# Altium PCB eDP_adapter_dvt1.PcbDoc (part 1 of 2)
Units mil, origin at the board's own origin, x right, y up, seen from the top; angles counter-clockwise.
Board outline 1964.57 x 1377.95 mil, 4 copper layers (Top Layer, Internal Plane 1, Internal Plane 2, Bottom Layer), stack 65.8 mil thick; 112 components, 78 nets, 1150 pads, 214 vias.
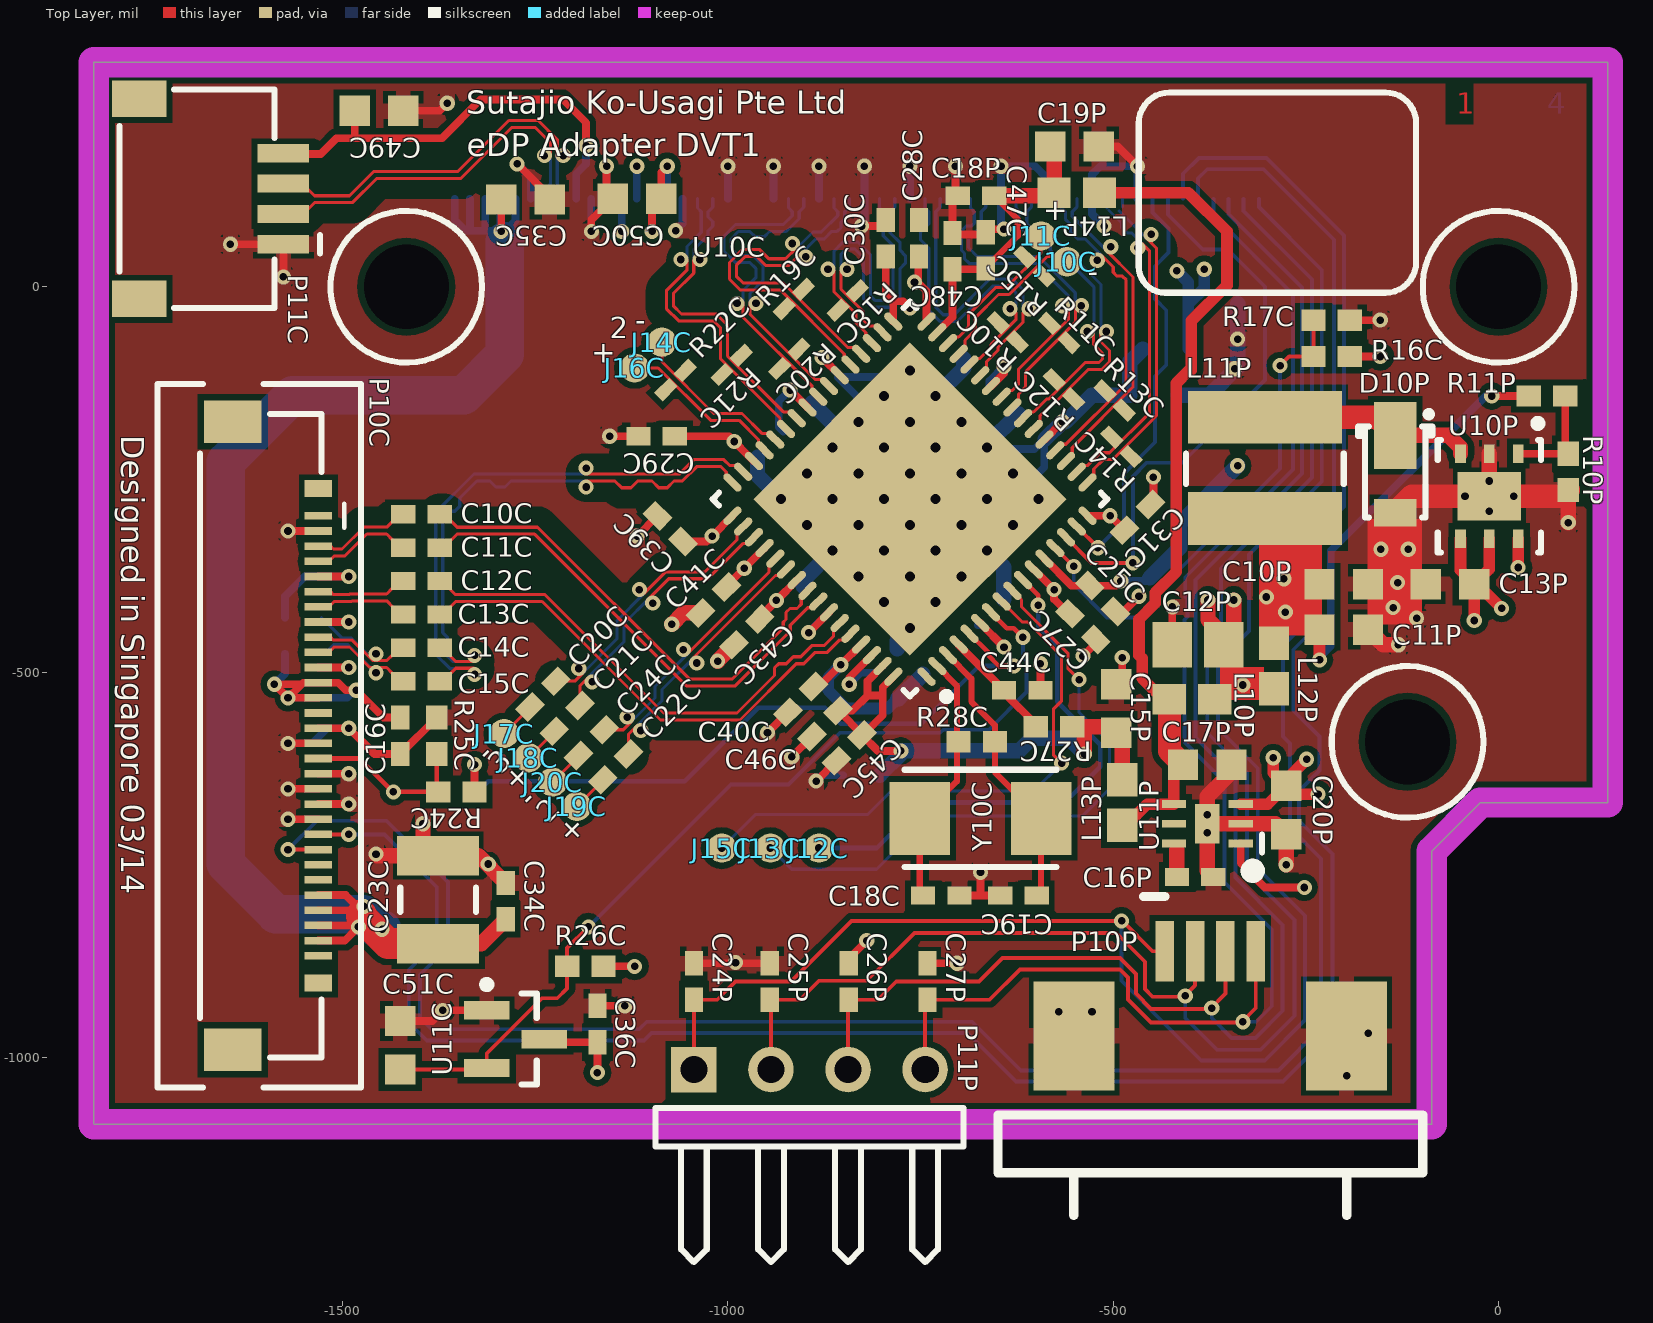
[diagram p0: Top Layer view]
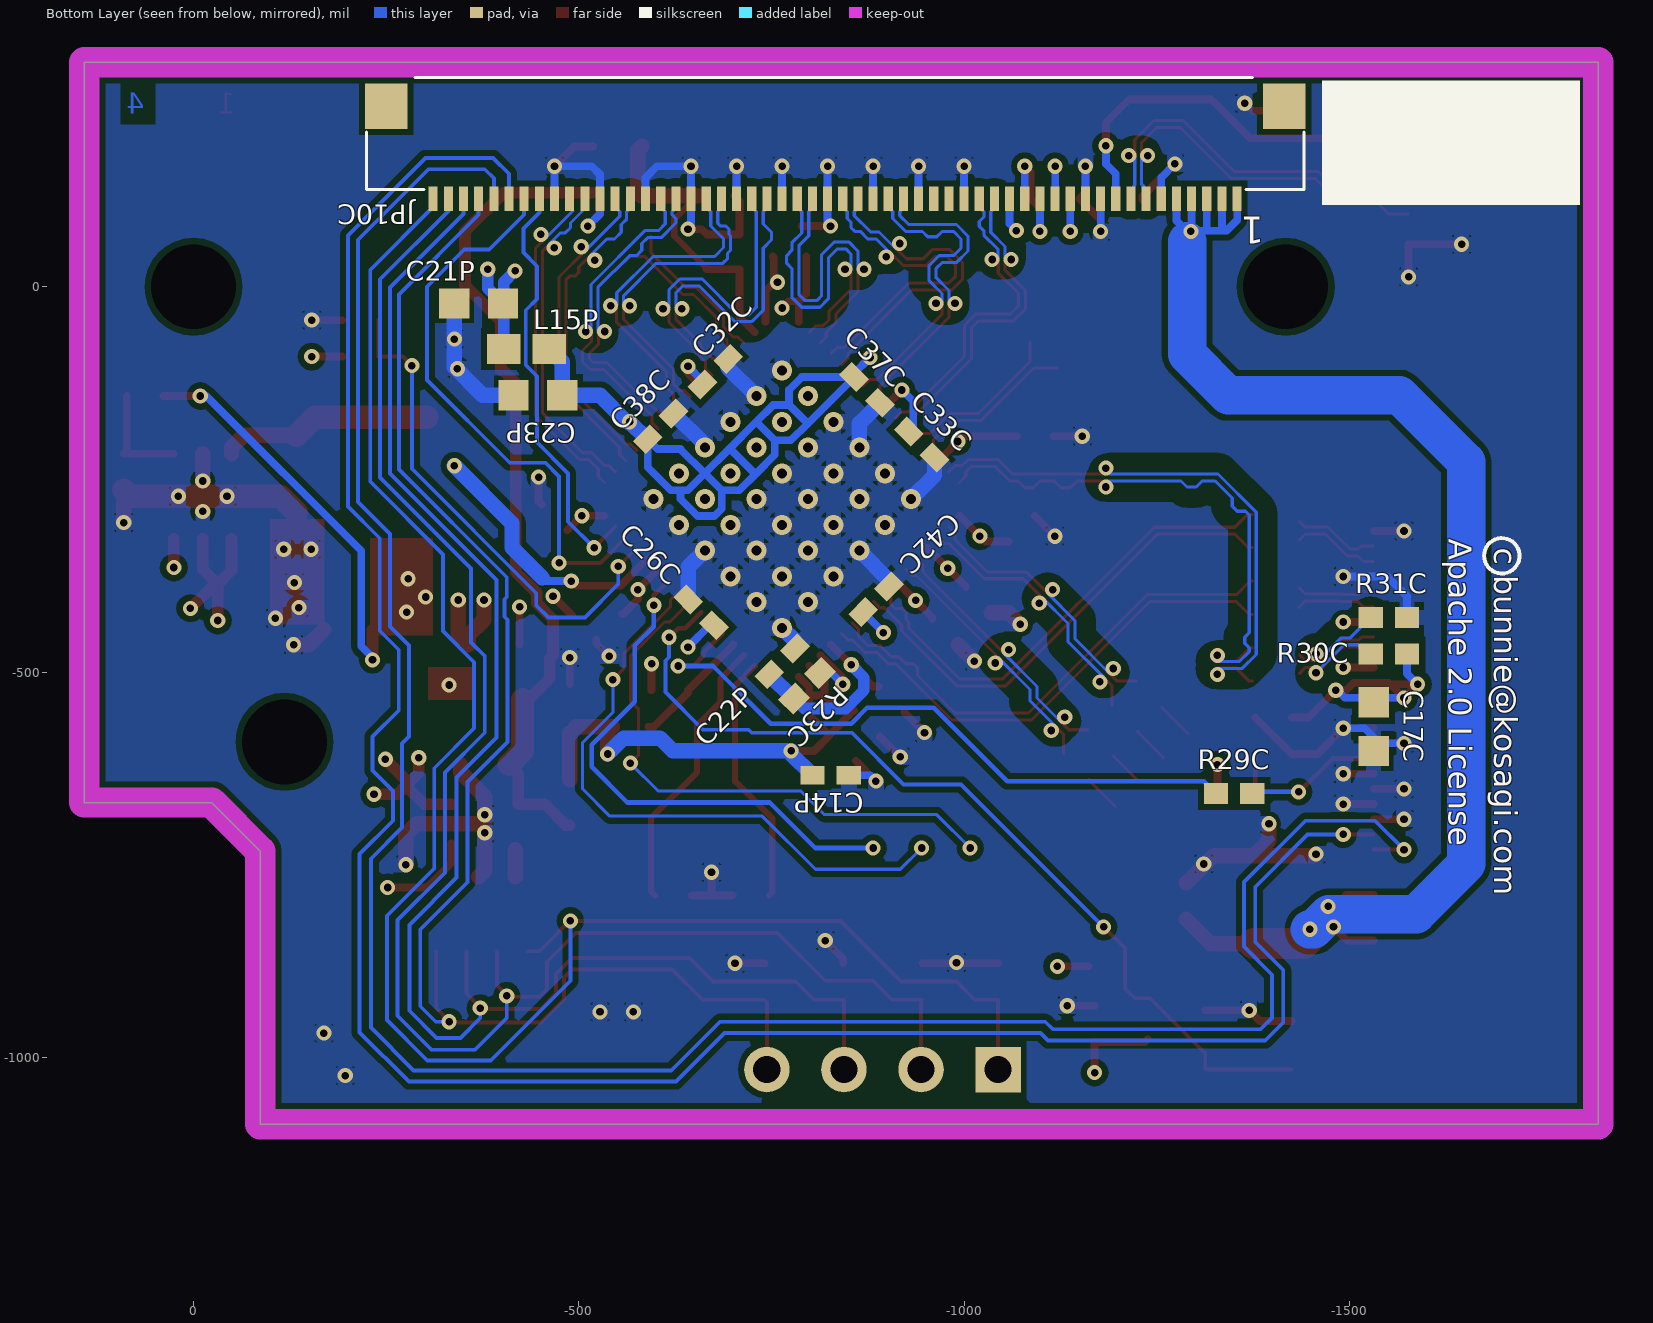
[diagram p1: Bottom Layer view, seen from below]
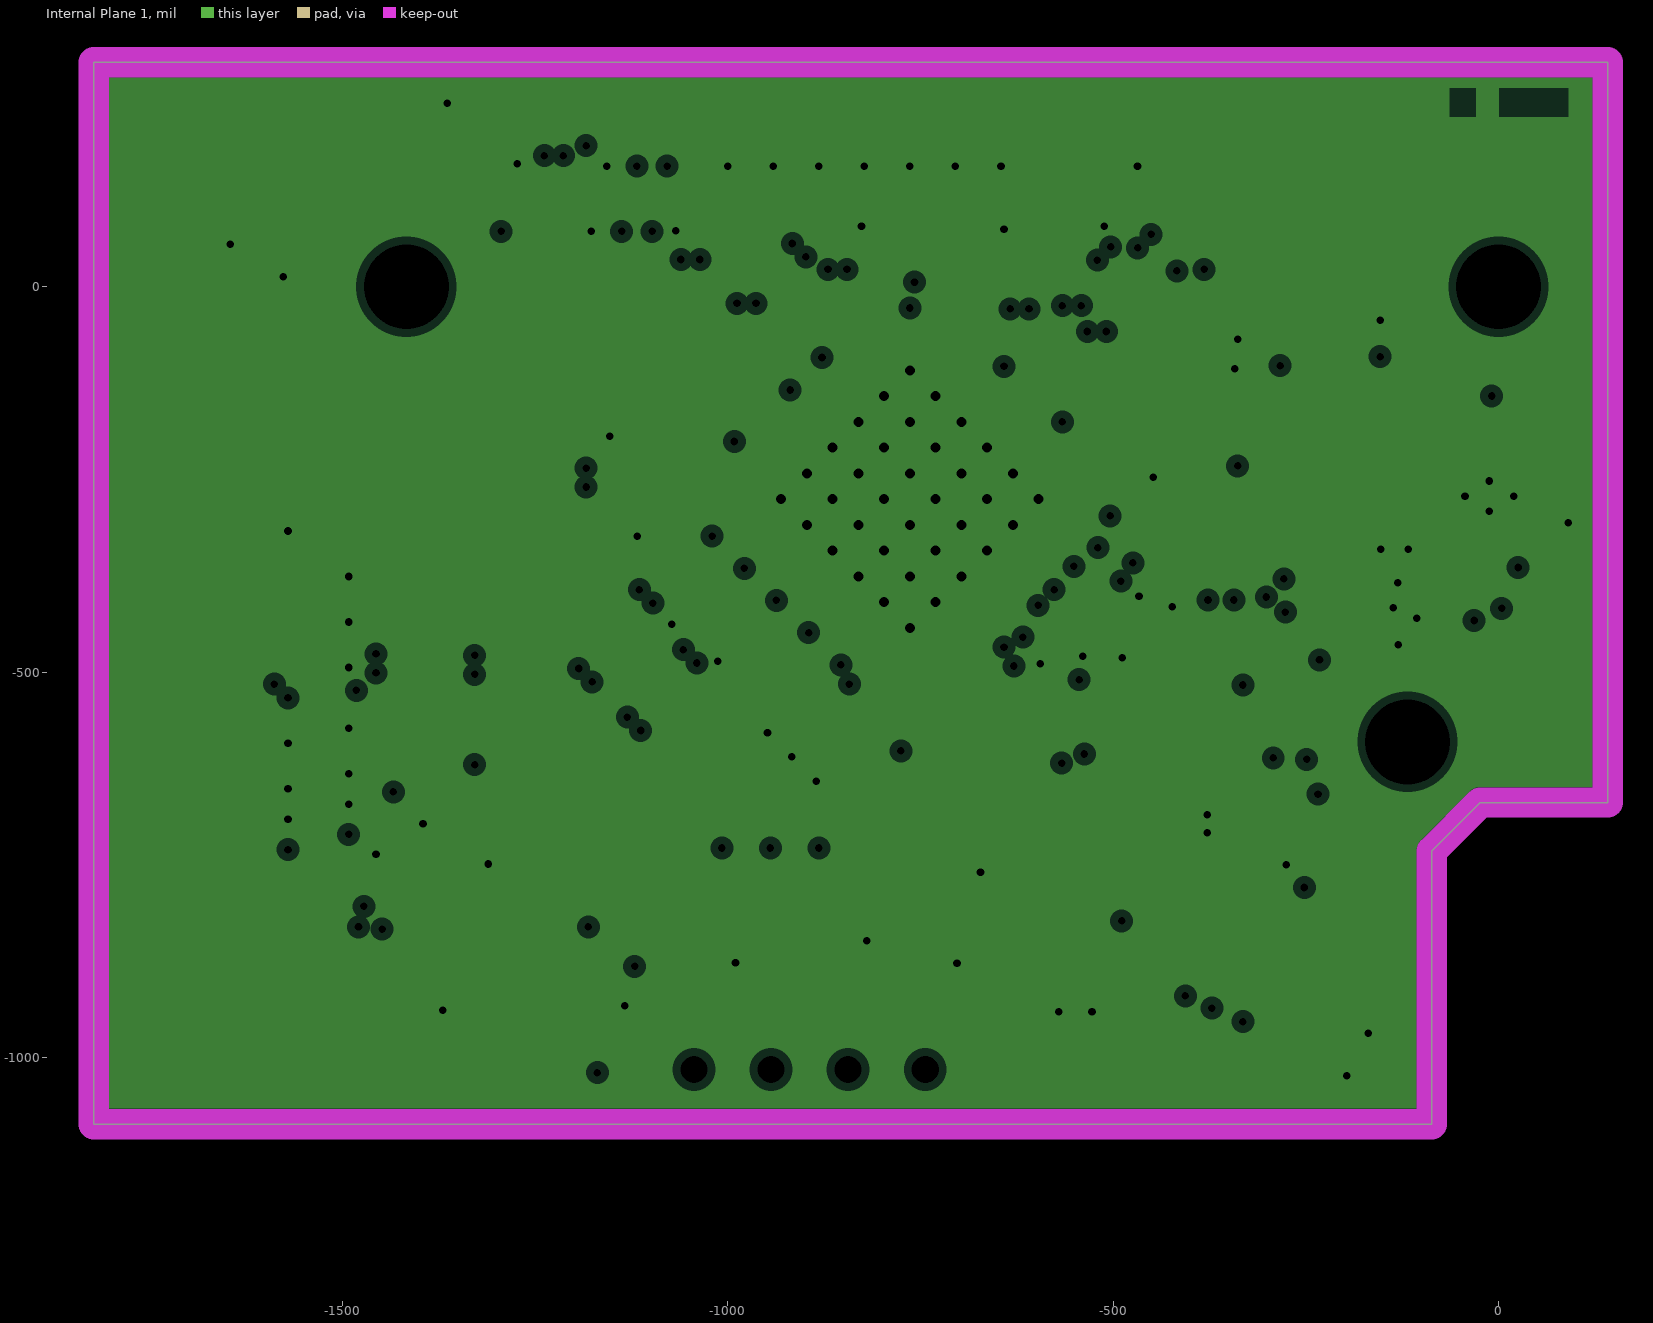
[diagram p2: Internal Plane 1, clearances drawn from the general rule]
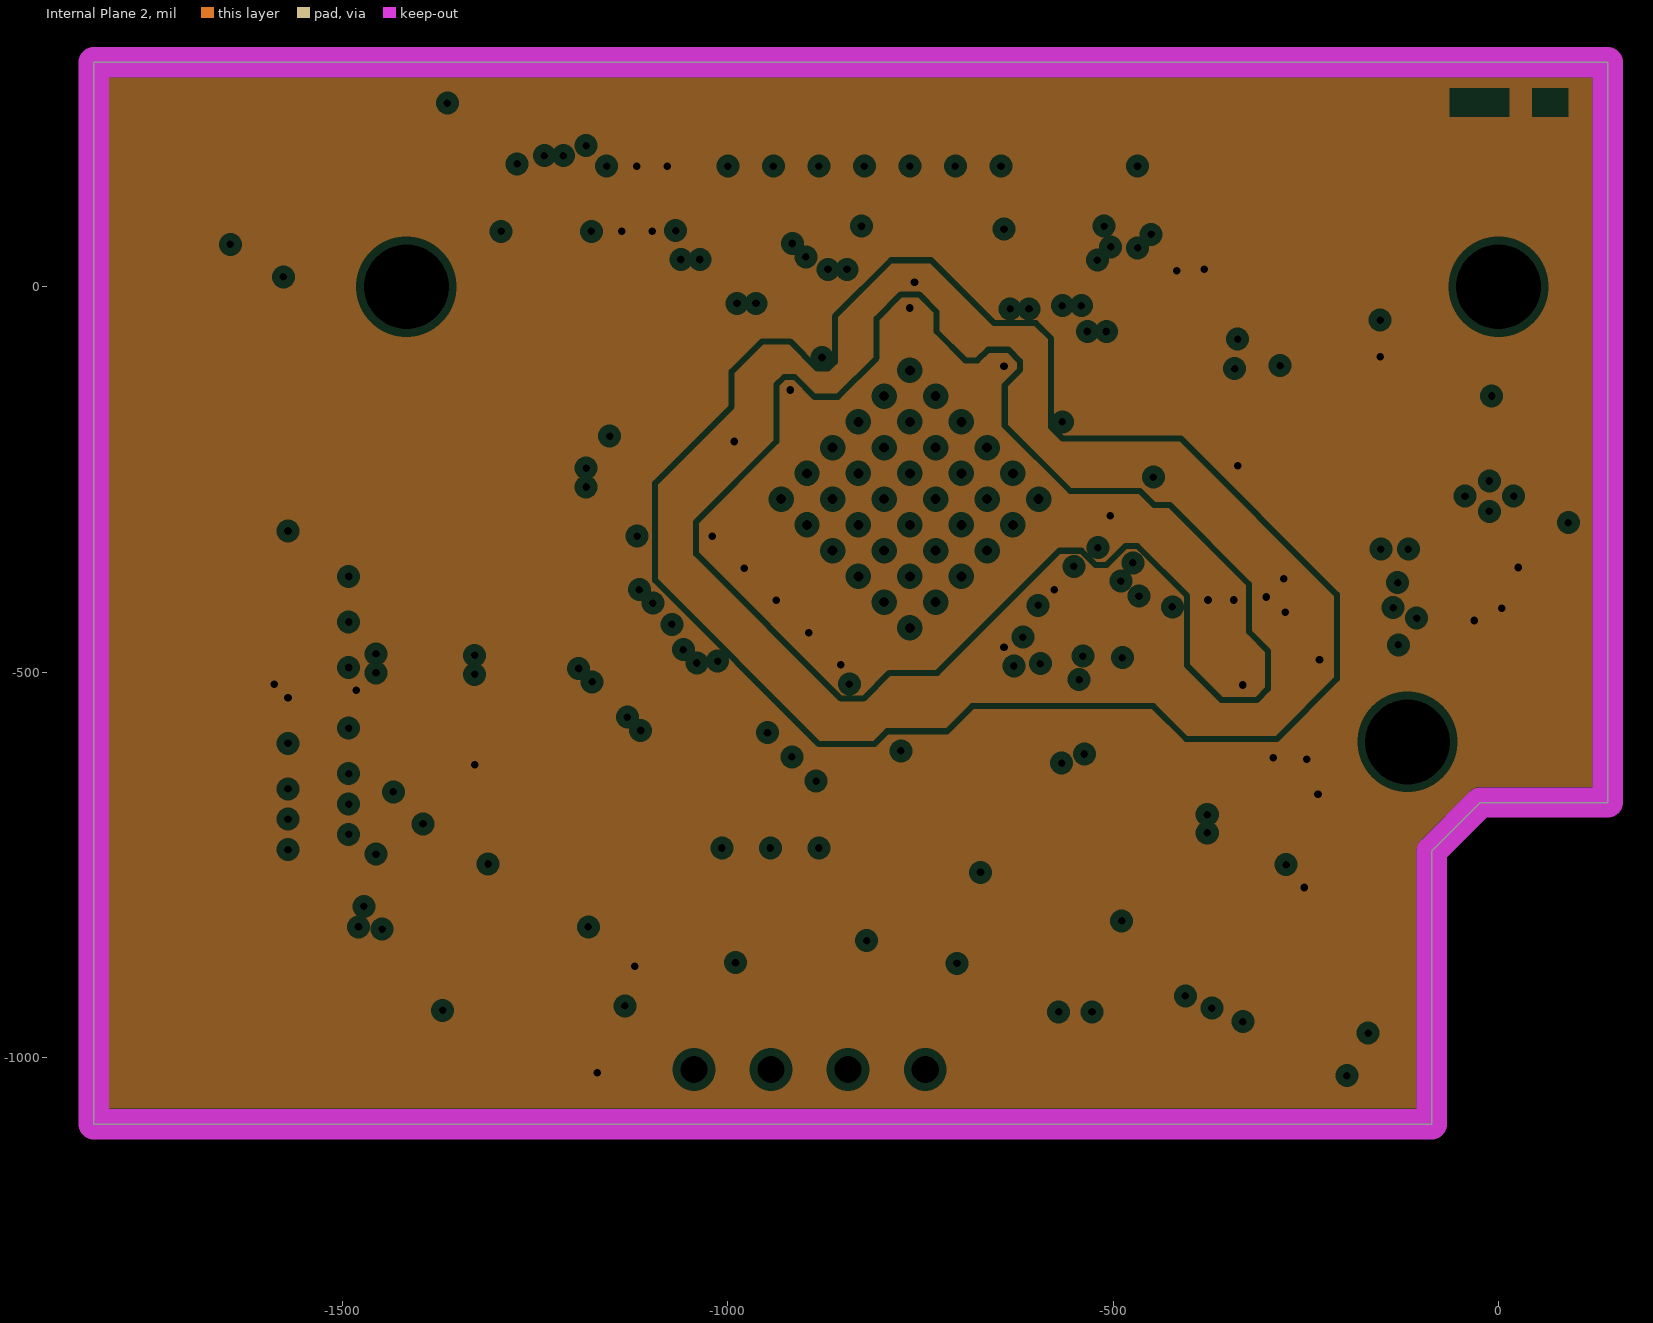
[diagram p3: Internal Plane 2, clearances drawn from the general rule]

## Layer stack, top to bottom
Top Solder: solder mask 0.4, Solder Resist, Dk 3.5
Top Layer: signal copper 1.4
Dielectric1: core 12.6, FR-4, Dk 4.8
Internal Plane 1: plane copper 1.4, net GND
Dielectric2: prepreg 35, FR-4, Dk 4.8
Internal Plane 2: plane copper 1.4, net (Multiple Nets)
Dielectric3: core 12.6, FR-4, Dk 4.8
Bottom Layer: signal copper 1.4
Bottom Solder: solder mask 0.4, Solder Resist, Dk 3.5

## Board outline
-1822.83,-1086.61 -86.61,-1086.61 -86.61,-732.28 -23.62,-669.29 141.73,-669.29 141.73,291.34 -1822.83,291.34

## Design rules (kind name [scope] priority, off if disabled: settings)
Clearance Clearance_diff_to_plane [InPoly vs IsTrack and InDifferentialPairClass('All Differential Pairs')] p1: gap=25
Clearance Clearance_poly [InPoly] p2: gap=8
Clearance Clearance_NPTH [PadIsPlated = 'False'] p3: gap=12
Clearance [All] p4: gap=4
ComponentClearance [All] p1 off: gap=10 collisioncheckmode=3 verticalgap=10 showdistances=FALSE
DiffPairsRouting [All] p1: maxlimit=10 minlimit=5 mostfreqgap=5 toplayer_minwidth=4.02 toplayer_maxwidth=4.02 toplayer_prefwidth=4.02 bottomlayer_minwidth=4.02 bottomlayer_maxwidth=4.02 bottomlayer_prefwidth=4.02 maxuncoupledlength=500
Height [All] p1 off: minheight=0 maxheight=1000 prefheight=500
HoleSize [All] p1: absolutevalues=TRUE maxlimit=175 minlimit=1 maxpercent=80.000 minpercent=20.000
MinimumSolderMaskSliver [All] p1 off: minsoldermaskwidth=10
NetAntennae [All] p1 off: netantennaetolerance=0
PlaneClearance [All] p1: clearance=10
PlaneConnect [All] p1: planeconnectstyle=Direct reliefexpansion=20 reliefentries=4 reliefconductorwidth=10 reliefairgap=10
PolygonConnect [All] p1: connectstyle=Relief reliefconductorwidth=20 reliefentries=4 polygonreliefangle="90 Angle" airgapwidth=6
RoomDefinition it6251_core [InComponentClass('it6251_core')] p1 off: confinementstyle=ConfineIn formatcopy=TRUE lockcomponents=FALSE outline 186.01,-958.67 397.64,-958.67 397.64,383.85 186.01,383.85
RoomDefinition power [InComponentClass('power')] p2 off: confinementstyle=ConfineIn formatcopy=TRUE lockcomponents=FALSE outline 12.78,1131.89 103.35,1131.89 103.35,998.03 12.78,998.03
RoutingVias [All] p1: holewidth=10 width=20 viastyle="Through Hole" minholewidth=8 minwidth=18 maxholewidth=15 maxwidth=30
SilkToSilkClearance [All] p1 off: silktosilkclearance=10
SilkToSolderMaskClearance SilkscreenOverComponentPads [IsPad] p1 off: minsilkscreentomaskgap=10 clearancetoexposedcopper=TRUE
SolderMaskExpansion [All] p1: expansion=2.76
Width [All] p1: maxlimit=200 minlimit=4 preferedwidth=8 minimp=50.000000 maximp=50.000000 favimp=50.000000
19 further rules are at their usual default settings.

## Classes and differential pairs
component class it6251_core: C10C C11C C12C C13C C14C C15C C16C C17C C18C C19C C20C C21C C22C C22P C23C C24C C25C C26C C27C C28C C29C C30C C31C C32C C33C C34C C35C C36C C37C C38C C39C C40C C41C C42C C43C C44C C45C C46C C47C C48C C49C C50C C51C J10C J11C J12C J13C J14C J15C J16C J17C J18C J19C J20C JP10C P10C P11C R10C R11C R12C R13C R14C R15C R16C R17C R18C R19C R20C R21C R22C R23C R24C R25C R26C R27C R28C R29C R30C R31C U10C U11C Y10C
component class power: C10P C11P C12P C13P C14P C15P C16P C17P C18P C19P C20P C21P C23P C24P C25P C26P C27P D10P L10P L11P L12P L13P L14P L15P P10P P11P R10P R11P U10P U11P
differential pair LVDS0_CLK: +LVDS0_CLK_P -LVDS0_CLK_N
differential pair LVDS0_TX_0: +LVDS0_TX_0_P -LVDS0_TX_0_N
differential pair LVDS0_TX_1: +LVDS0_TX_1_P -LVDS0_TX_1_N
differential pair LVDS0_TX_2: +LVDS0_TX_2_P -LVDS0_TX_2_N
differential pair LVDS0_TX_3: +LVDS0_TX_3_P -LVDS0_TX_3_N
differential pair LVDS1_CLK: +LVDS1_CLK_P -LVDS1_CLK_N
differential pair LVDS1_TX0: +LVDS1_TX0_P -LVDS1_TX0_N
differential pair LVDS1_TX1: +LVDS1_TX1_P -LVDS1_TX1_N
differential pair LVDS1_TX2: +LVDS1_TX2_P -LVDS1_TX2_N
differential pair LVDS1_TX_3: +LVDS1_TX_3_P -LVDS1_TX_3_N
differential pair USB_VID: +USB_VID_P -USB_VID_N
differential pair C_EDP_TX0: +C_EDP_TX0_P -C_EDP_TX0_N
differential pair C_EDP_TX1: +C_EDP_TX1_P -C_EDP_TX1_N
differential pair C_EDP_TXAUX: +C_EDP_TXAUX_P -C_EDP_TXAUX_N
differential pair EDP_TX0: +EDP_TX0_P -EDP_TX0_N
differential pair EDP_TX1: +EDP_TX1_P -EDP_TX1_N
differential pair EDP_TXAUX: +EDP_TXAUX_P -EDP_TXAUX_N
differential pair TX2: +TX2_P -TX2_N
differential pair TX3: +TX3_P -TX3_N

## Components (designator, comment, footprint, x,y, rotation, side; value= is the part's Value field where it differs from the comment)
C10C "0.1uF, 25V, X5R" CAPC1005N -1397.64,-295.28 r0 top
C10P "10uF, 10V, X5R, 20%" CAPC1608N -200.79,-385.83 r180 top
C11C "0.1uF, 25V, X5R" CAPC1005N -1397.64,-338.58 r0 top
C11P "10uF, 10V, X5R, 20%" CAPC1608N -200.79,-444.88 r180 top
C12C "0.1uF, 25V, X5R" CAPC1005N -1397.64,-381.89 r0 top
C12P "22uF, 10V, X5R, 20%" CAPC2012N -389.76,-464.57 r180 top
C13C "0.1uF, 25V, X5R" CAPC1005N -1397.64,-425.2 r0 top
C13P "4.7uF, 10V, X5R, 10%" CAPC1608N -62.99,-385.83 r180 top
C14C "0.1uF, 25V, X5R" CAPC1005N -1397.64,-468.5 r0 top
C14P "0.1uF, 25V, X5R" CAPC1005N -826.77,-633.86 r0 bottom
C15C "0.1uF, 25V, X5R" CAPC1005N -1397.64,-511.81 r0 top
C15P "10uF, 10V, X5R, 20%" CAPC1608N -496.06,-547.24 r270 top
C16C "0.1uF, 25V, X5R" CAPC1005N -1425.2,-582.68 r270 top
C16P "0.1uF, 25V, X5R" CAPC1005N -393.7,-765.75 r180 top
C17C "10uF, 10V, X5R, 20%" CAPC1608N -1531.5,-570.87 r90 bottom
C17P "10uF, 10V, X5R, 20%" CAPC1608N -377.95,-620.08 r180 top
C18C "22pF, NP0" CAPC1005N -723.14,-790.07 r180 top
C18P "0.1uF, 25V, X5R" CAPC1005N -678.15,118.11 r0 top
C19C "22pF, NP0" CAPC1005N -622.92,-790.07 r0 top
C19P "10uF, 10V, X5R, 20%" CAPC1608N -550.2,182.09 r180 top
C20C "0.1uF, 25V, X5R" CAPC1005N -1240.16,-528.54 r225 top
C20P "10uF, 10V, X5R, 20%" CAPC1608N -275.59,-679.13 r90 top
C21C "0.1uF, 25V, X5R" CAPC1005N -1208.66,-560.04 r225 top
C21P "10uF, 10V, X5R, 20%" CAPC1608N -370.08,-21.65 r180 bottom
C22C "0.1uF, 25V, X5R" CAPC1005N -1145.67,-623.03 r45 top
C22P "0.1uF, 25V, X5R" CAPC1005N -763.78,-486.22 r315 bottom
C23C "22uF, 25V, X5R, 10%" CAPC3225N -1375.98,-795.28 r90 top
C23P "10uF, 10V, X5R, 20%" CAPC1608N -446.85,-140.75 r180 bottom
C24C "0.1uF, 25V, X5R" CAPC1005N -1177.17,-591.54 r45 top
C24P "10nF, 25V, X5R" CAPC1005N -1044.09,-901.57 r270 top
C25C "0.1uF, 25V, X5R" CAPC1005N -513.78,-404.53 r315 top
C25P "10nF, 25V, X5R" CAPC1005N -945.67,-901.57 r270 top
C26C "0.1uF, 25V, X5R" CAPC1005N -658.69,-422.44 r45 bottom
C26P "10nF, 25V, X5R" CAPC1005N -843.31,-901.57 r270 top
C27C "0.1uF, 25V, X5R" CAPC1005N -539.37,-440.94 r315 top
C27P "10nF, 25V, X5R" CAPC1005N -740.94,-901.57 r270 top
C28C "0.1uF, 25V, X5R" CAPC1005N -751.97,62.99 r90 top
C29C "0.1uF, 25V, X5R" CAPC1005N -1092.52,-193.9 r180 top
C30C "0.1uF, 25V, X5R" CAPC1005N -795.28,62.99 r90 top
C31C "0.1uF, 25V, X5R" CAPC1005N -468.5,-299.21 r45 top
C32C "0.1uF, 25V, X5R" CAPC1005N -677.17,-110.24 r135 bottom
C33C "0.1uF, 25V, X5R" CAPC1005N -944.88,-204.72 r225 bottom
C34C "0.1uF, 25V, X5R" CAPC1005N -1288.39,-797.24 r90 top
C35C "1.0uF, 25V, 20% X5R" CAPC1608N -1262.8,113.19 r0 top
C36C "0.1uF, 25V, X5R" CAPC1005N -1169.29,-956.69 r90 top
C37C "0.1uF, 25V, X5R" CAPC1005N -874.02,-133.86 r225 bottom
C38C "0.1uF, 25V, X5R" CAPC1005N -606.3,-181.1 r135 bottom
C39C "0.1uF, 25V, X5R" CAPC1005N -1074.8,-313.98 r135 top
C40C "0.1uF, 25V, X5R" CAPC1005N -905.51,-535.43 r225 top
C41C "0.1uF, 25V, X5R" CAPC1005N -1018.7,-406.5 r225 top
C42C "0.1uF, 25V, X5R" CAPC1005N -885.83,-405.51 r135 bottom
C43C "0.1uF, 25V, X5R" CAPC1005N -975.39,-447.83 r225 top
C44C "0.1uF, 25V, X5R" CAPC1005N -618.11,-523.62 r0 top
C45C "0.1uF, 25V, X5R" CAPC1005N -842.52,-598.43 r225 top
C46C "1nF, 25V, X5R" CAPC1005N -874.02,-566.93 r225 top
C47C "0.1uF, 25V, X5R" CAPC1005N -665.35,47.24 r90 top
C48C "1nF, 25V, X5R" CAPC1005N -708.66,46.26 r90 top
C49C "10uF, 10V, X5R, 20%" CAPC1608N -1452.76,228.35 r180 top
C50C "10uF, 10V, X5R, 20%" CAPC1608N -1118.11,114.17 r0 top
C51C "DNP" CAPC1608N -1425.2,-984.25 r90 top
D10P "DFLS160-7" POWERDI-123 -133.86,-240.16 r270 top
J10C "test point (DNP)" TP_SMT_38mil -560.04,32.48 r90 top
J11C "test point (DNP)" TP_SMT_38mil -593.5,65.94 r90 top
J12C "test point (DNP)" TP_SMT_38mil -881.89,-728.35 r90 top
J13C "test point (DNP)" TP_SMT_38mil -944.88,-728.35 r135 top
J14C "test point (DNP)" TP_SMT_38mil -1085.63,-71.85 r135 top
J15C "test point (DNP)" TP_SMT_38mil -1007.87,-728.35 r135 top
J16C "test point (DNP)" TP_SMT_38mil -1121.06,-105.32 r135 top
J17C "test point (DNP)" TP_SMT_38mil -1290.35,-579.72 r90 top
J18C "test point (DNP)" TP_SMT_38mil -1258.86,-611.22 r90 top
J19C "test point (DNP)" TP_SMT_38mil -1195.87,-674.21 r90 top
J20C "test point (DNP)" TP_SMT_38mil -1227.36,-642.72 r90 top
JP10C "54-pin FFC MOLEX 51296-5494 or equiv" MOLEX_51296_5494 -1354.33,114.17 r0 bottom
L10P "BLM18KG121 (DNP)" INDC1608AN -397.64,-535.43 r180 top
L11P "2.2uH, coilcraft MSS5131-222ML" COILCRAFT_MSS5121 -303.15,-169.29 r0 top
L12P "BLM18KG121" INDC1608AN -291.34,-492.13 r270 top
L13P "BLM18KG121" INDC1608AN -488.19,-669.29 r90 top
L14P "BLM18KG121" INDC1608AN -547.24,122.05 r180 top
L15P "BLM18KG121" INDC1608AN -432.09,-80.71 r180 bottom
P10C "IPEX 20455-030E-*2 or Tyco (5-)2069716-2 or equiv" TYCO_5-2069716-2 -1531.5,-582.68 r270 top
P10P "AMP 487951-4" AMP_487951_4 -433.07,-862.2 r0 top
P11C "JST 04FMN-SMT-A-TF 1mm side-entry" JST_04FMN_SMT_A_TF -1576.77,55.12 r90 top
P11P "Male 2.54mm 4x1 right-angle header (DNP)" HDR1X4H -1044.09,-1015.75 r0 top
R10C "100, 1% (DNP)" RESC0603N -636.81,-59.06 r315 top
R10P "10k, 1%" RESC1005N 90.55,-240.16 r270 top
R11C "100, 1% (DNP)" RESC0603N -569.88,-60.04 r315 top
R11P "20k, 1%" RESC1005N 62.99,-141.73 r0 top
R12C "100, 1% (DNP)" RESC0603N -563.98,-132.87 r315 top
R13C "100, 1% (DNP)" RESC0603N -498.03,-147.64 r315 top
R14C "100, 1% (DNP)" RESC0603N -489.17,-207.68 r315 top
R15C "100, 1% (DNP)" RESC0603N -602.36,26.57 r315 top
R16C "10k, 1% (DNP)" RESC1005N -216.54,-90.55 r180 top
R17C "10k, 1%" RESC1005N -216.54,-43.31 r0 top
R18C "100, 1% (DNP)" RESC0603N -844.49,-17.72 r225 top
R19C "100, 1% (DNP)" RESC0603N -914.37,-15.75 r225 top
R20C "100, 1% (DNP)" RESC0603N -920.28,-93.5 r225 top
R21C "100, 1% (DNP)" RESC0603N -995.08,-101.38 r225 top
R22C "100, 1% (DNP)" RESC0603N -1067.91,-121.06 r45 top
R23C "820, 1%" RESC1005N -796.26,-517.72 r315 bottom
R24C "100k, 1% (DNP)" RESC1005N -1352.36,-655.51 r180 top
R25C "100k, 1%" RESC1005N -1377.95,-582.68 r90 top
R26C "10k, 1%" RESC1005N -1185.04,-881.89 r180 top
R27C "0 ohm" RESC1005N -576.77,-570.87 r180 top
R28C "1M, 5%" RESC1005N -677.17,-590.55 r180 top
R29C "33, 1%" RESC1005N -1350.39,-657.48 r180 bottom
R30C "100k, 1%" RESC1005N -1551.18,-476.38 r180 bottom
R31C "100k, 1%" RESC1005N -1551.18,-429.13 r180 bottom
U10C "IT6251" QFN50P900X900-64WAN -763.78,-275.59 r135 top
U10P "LMR10510YSD" SON95P300X300X80-7V -11.97,-271.78 r270 top
U11C "APX803-29-SAG-7 2.93V setpoint" SOT23-3N -1275.59,-976.38 r0 top
U11P "MIC5319-1.8YML" MICREL_MLF2x2_6 -342.52,-722.44 r180 top
Y10C "27 MHz, 50ppm, 8-18pF, ESR <80 ohm" NDK_NX5032A -750.98,-689.85 r0 top

## Footprints (in the part's own frame and the unit in brackets; to place one, negate y for a bottom-side part, rotate by r counter-clockwise, add the part's x,y. Pads: shape width x height; smd on the part's side, far side on the other; paste and mask are expansions set on the pad)
AMP_487951_4 [mm] "4-pin FF connector, 1mm pitch"
  rect 0.61x2 smd: 1(0,0) 2(1,0) 3(2,0) 4(3,0)
  rect 2.68x3.6 smd: MP1(-2.99,-2.8) MP2(5.99,-2.8)
  silkscreen extent -5.5,-8.7 8.5,1.8, body extent -4.46,-5.85 7.46,0.7, height 2.7
CAPC1005N [mm] "Chip Capacitor, Body 1.0x0.5mm, IPC Medium Density"
  rect 0.8x0.6 smd: 1(-0.6,0) 2(0.6,0)
  body extent -0.55,-0.3 0.55,0.3, height 0.6
CAPC1608N [mm] "Chip Capacitor, Body 1.6x0.8mm, IPC Medium Density"
  rect 1x1 smd: 1(-0.8,0) 2(0.8,0)
  body extent -0.87,-0.48 0.87,0.48, height 0.85
CAPC2012N [mm] "Chip Capacitor, Body 2.0x1.3mm, IPC Medium Density"
  rect 1.3x1.5 smd: 1(-0.85,0) 2(0.85,0)
  body extent -1.1,-0.72 1.1,0.72, height 1.1
CAPC3225N [mm] "Chip Capacitor, Body 3.2x2.5mm, IPC Medium Density"
  rect 1.3x2.7 smd: 1(-1.45,0) 2(1.45,0)
  silkscreen extent -0.4,-1.25 0.4,1.25, body extent -1.7,-1.35 1.7,1.35, height 1.35
COILCRAFT_MSS5121 [mm] "Coilcraft shielded power inductor"
  rect 5.08x1.74 smd mask+0.075: 1(0,0) 2(0,-3.34)
  silkscreen extent -2.6,-2.2 2.6,-1.2, body extent -2.6,-4.3 2.6,0.9, height 2.2
HDR1X4H [mm] "Connector; Header; 4 Position; Right Angle"
  rect 1.5x1.5 hole 0.9: 1(0,0)
  round 1.5 hole 0.9: 2(2.54,0) 3(5.08,0) 4(7.62,0)
  silkscreen extent -1.27,-6.35 8.89,-1.27
INDC1608AN [mm] "Chip Inductor, Body 1.6x0.8mm, IPC Medium Density"
  rect 1.1x1 smd: 1(-0.75,0) 2(0.75,0)
  body extent -0.9,-0.5 0.9,0.5, height 1
JST_04FMN_SMT_A_TF [mm] "JST 4-pin side-entry 1mm SMT FFC/FPC connector"
  rect 1.2x1.8 smd mask+0.07: 0(-1.8,4.75) 0(4.8,4.75)
  rect 0.6x1.7 smd mask+0.07: 1(0,0) 2(1,0) 3(2,0) 4(3,0)
  silkscreen extent -2.1,-1.2 5.1,5.4, body extent -2.1,0.3 5.1,5.4, height 3.05
MICREL_MLF2x2_6 [mm] "6-pin 2x2mm MLF package (Micrel)"
  rect 0.8x0.26 smd mask+0.07: 1(-0.2,0) 2(-0.2,-0.65) 3(-0.2,-1.3) 4(2,-1.3) 5(2,-0.65) 6(2,0)
  rect 0.8x1.3 smd mask+0.07: PAD(0.9,-0.65)
  silkscreen extent -0.9,-0.3 -0.4,1.1, body extent -0.1,-1.7 1.9,0.3, height 0.85
MOLEX_51296_5494 [mm] "54-pin FF connector"
  rect 1.4x1.5 smd mask+0.07: 0(-1.55,-3.05) 0(28.05,-3.05)
  rect 0.3x0.8 smd mask+0.07: 1(0,0) 2(0.5,0) 3(1,0) 4(1.5,0) 5(2,0) 6(2.5,0) 7(3,0) 8(3.5,0) 9(4,0) 10(4.5,0) 11(5,0) 12(5.5,0) 13(6,0) 14(6.5,0) 15(7,0) 16(7.5,0) 17(8,0) 18(8.5,0) 19(9,0) 20(9.5,0) 21(10,0) 22(10.5,0) 23(11,0) 24(11.5,0) 25(12,0) 26(12.5,0) 27(13,0) 28(13.5,0) 29(14,0) 30(14.5,0) 31(15,0) 32(15.5,0) 33(16,0) 34(16.5,0) 35(17,0) 36(17.5,0) 37(18,0) 38(18.5,0) 39(19,0) 40(19.5,0) 41(20,0) 42(20.5,0) 43(21,0) 44(21.5,0) 45(22,0) 46(22.5,0) 47(23,0) 48(23.5,0) 49(24,0) 50(24.5,0) 51(25,0) 52(25.5,0) 53(26,0) 54(26.5,0)
  silkscreen extent -2.2,-4 28.7,-0.3, body extent -2.2,-4 28.7,-0.3, height 1.3
NDK_NX5032A [mm] "5x3.2mm crystal, SMT"
  rect 2x2.4 smd: 1(0,0) 2(4,0)
  silkscreen extent -0.5,-1.6 4.5,1.6
POWERDI-123 [mm] "SOD-123 power package, Diodes Inc"
  rect 0.9x1.4 smd: 1(1.35,0)
  rect 2.2x1.4 smd: 2(-1.2,0)
  silkscreen extent -1.95,-1.22 1.5,1.23, body extent -1.5,-0.96 1.5,0.96, height 1
QFN50P900X900-64WAN [mm] "QFN, 64-Leads, Body 9x9mm, Pitch 0.5mm, IPC Medium Density"
  oval 0.75x0.25 smd: 1(-4.525,3.75) 2(-4.525,3.25) 3(-4.525,2.75) 4(-4.525,2.25) 5(-4.525,1.75) 6(-4.525,1.25) 7(-4.525,0.75) 8(-4.525,0.25) 9(-4.525,-0.25) 10(-4.525,-0.75) 11(-4.525,-1.25) 12(-4.525,-1.75) 13(-4.525,-2.25) 14(-4.525,-2.75) 15(-4.525,-3.25) 16(-4.525,-3.75) 33(4.525,-3.75) 34(4.525,-3.25) 35(4.525,-2.75) 36(4.525,-2.25) 37(4.525,-1.75) 38(4.525,-1.25) 39(4.525,-0.75) 40(4.525,-0.25) 41(4.525,0.25) 42(4.525,0.75) 43(4.525,1.25) 44(4.525,1.75) 45(4.525,2.25) 46(4.525,2.75) 47(4.525,3.25) 48(4.525,3.75)
  oval 0.25x0.75 smd: 17(-3.75,-4.525) 18(-3.25,-4.525) 19(-2.75,-4.525) 20(-2.25,-4.525) 21(-1.75,-4.525) 22(-1.25,-4.525) 23(-0.75,-4.525) 24(-0.25,-4.525) 25(0.25,-4.525) 26(0.75,-4.525) 27(1.25,-4.525) 28(1.75,-4.525) 29(2.25,-4.525) 30(2.75,-4.525) 31(3.25,-4.525) 32(3.75,-4.525) 49(3.75,4.525) 50(3.25,4.525) 51(2.75,4.525) 52(2.25,4.525) 53(1.75,4.525) 54(1.25,4.525) 55(0.75,4.525) 56(0.25,4.525) 57(-0.25,4.525) 58(-0.75,4.525) 59(-1.25,4.525) 60(-1.75,4.525) 61(-2.25,4.525) 62(-2.75,4.525) 63(-3.25,4.525) 64(-3.75,4.525)
  rect 7.3x7.3 smd mask-5: 65(0,0)
  silkscreen extent -5.57,-4.6 4.6,4.6, body extent -4.58,-4.58 4.58,4.58, height 0.8
RESC0603N [mm] "Chip Resistor, Body 0.6x0.3mm, IPC Medium Density"
  rect 0.7x0.4 smd: 1(-0.45,0) 2(0.45,0)
  body extent -0.32,-0.17 0.32,0.17, height 0.3
RESC1005N [mm] "Chip Resistor, Body 1.1x0.5mm, IPC Medium Density"
  rect 0.8x0.7 smd: 1(-0.6,0) 2(0.6,0)
  body extent -0.55,-0.3 0.55,0.3, height 0.4
SON95P300X300X80-7V [mm] "SON, 6-Leads, Body 3x3 mm, Pitch 0.95mm, NSC Recommended"
  rect 0.6x0.35 smd paste-0.175 mask+0.051: 1(-1.4,0.95) 2(-1.4,0) 3(-1.4,-0.95) 4(1.4,-0.95) 5(1.4,0) 6(1.4,0.95)
  rect 1.6x2.1 smd paste-0.8 mask+0.051: 7(0,0)
  silkscreen extent -2.52,-1.7 1.85,1.73, body extent -1.55,-1.55 1.55,1.55, height 0.8
SOT23-3N [mm] "SOT23, 3-Leads, Body 2.9x1.3mm, Pitch 0.95mm, Lead Span 2.5mm, IPC Medium Density"
  rect 1.5x0.6 smd: 1(-0.95,0.95) 2(-0.95,-0.95) 3(0.95,0)
  silkscreen extent -1.07,-1.5 0.7,1.92, body extent -0.7,-1.5 0.7,1.5, height 1.1
TP_SMT_38mil [mil] "38 mil round test point, SMT"
  round 38 smd: 1(0,0)
TYCO_5-2069716-2 [mm] "LCEDI 0.5mm connector / CABLINE-VS 30-pin connector"
  rect 1.4x1.9 smd mask+0.07: 0(-10.35,-2.82) 0(10.35,-2.82)
  rect 0.55x0.9 smd mask+0.07: 0(-8.15,0) 0(8.15,0)
  rect 0.25x0.9 smd mask+0.07: 1(-7.25,0) 2(-6.75,0) 3(-6.25,0) 4(-5.75,0) 5(-5.25,0) 6(-4.75,0) 7(-4.25,0) 8(-3.75,0) 9(-3.25,0) 10(-2.75,0) 11(-2.25,0) 12(-1.75,0) 13(-1.25,0) 14(-0.75,0) 15(-0.25,0) 16(0.25,0) 17(0.75,0) 18(1.25,0) 19(1.75,0) 20(2.25,0) 21(2.75,0) 22(3.25,0) 23(3.75,0) 24(4.25,0) 25(4.75,0) 26(5.25,0) 27(5.75,0) 28(6.25,0) 29(6.75,0) 30(7.25,0)
  silkscreen extent -11.6,-5.3 11.6,1.4, body extent -10.62,-3.95 10.63,0, height 0.97

## Part data
C10C C10P C11C C11P C12C C12P C13C C13P C14C C14P C15C C15P C16C C16P C17C C17P C18C C18P C19C C19P C20C C20P C21C C21P C22C C22P C23C C23P C24C C24P C25C C25P C26C C26P C27C C27P C28C C29C C30C C31C C32C C33C C34C C35C C36C C37C C38C C39C C40C C41C C42C C43C C44C C45C C46C C47C C48C C49C C50C C51C: library part "Cap Semi", "Capacitor (Semiconductor SIM Model)"
D10P: library part "D Schottky", "Schottky Diode"
J10C J11C J12C J13C J14C J15C J16C J17C J18C J19C J20C: library part CON1, "Connector"
JP10C: library part HEADER_54, "Flat flex connector, 54 positions"
L10P L11P L12P L13P L14P L15P: library part "Inductor Iron", "Magnetic-Core Inductor"
P10C: library part "Header 30"
P10P: library part TFT_TP_CON
P11C: library part "Header 4", "Header, 4-Pin"
P11P: library part "Header 4H", "Header, 4-Pin, Right Angle"
R10C R10P R11C R11P R12C R13C R14C R15C R16C R17C R18C R19C R20C R21C R22C R23C R24C R25C R26C R27C R28C R29C R30C R31C: library part Res1, "Resistor"
U10C: "LVDS to eDP converter"
U10P: library part LMR10515XSD, "NatSemi 1.5A step-down regulator in LLP"
U11C: library part RESET_SOT23, "Reset monitor. Voltage specified by XX in P/N. Multiple vendors."
U11P: library part MIC5319-XXYML, "500 mA uCap ultra-low dropout high PSRR LDO regulator"
Y10C: library part XTAL, "Crystal Oscillator"

## Free pads (board coordinates)
  round 47.24 hole 110.24 unplated: 0(-118.11,-590.55) 1(0,0) 2(-1417.32,0)
  rect 2x34 on Bottom Overlay: 1(-1778.25,-155.02) 1(-1736.25,-237.02) 1(-1736.25,-73.02) 1(-1542.25,-237.02) 1(-1542.25,-73.02)
  rect 2x38 on Bottom Overlay: 1(-1776.25,-155.02) 1(-1774.25,-155.02) 1(-1772.25,-155.02) 1(-1734.25,-237.02) 1(-1734.25,-73.02)
  rect 2x40 on Bottom Overlay: 1(-1770.25,-156.02) 1(-1544.25,-236.02) 1(-1544.25,-74.02)
  rect 2x42 on Bottom Overlay: 1(-1768.25,-155.02) 1(-1766.25,-155.02) 1(-1764.25,-155.02) 1(-1762.25,-155.02) 1(-1760.25,-155.02)
  rect 2x44 on Bottom Overlay: 1(-1758.25,-156.02) 1(-1732.25,-236.02) 1(-1732.25,-74.02) 1(-1546.25,-236.02) 1(-1546.25,-74.02)
  rect 2x46 on Bottom Overlay: 1(-1756.25,-155.02) 1(-1754.25,-155.02) 1(-1752.25,-155.02) 1(-1750.25,-155.02)
  rect 2x4 on Bottom Overlay: 1(-1748.25,-240.02) 1(-1748.25,-70.02) 1(-1542.25,-198.02) 1(-1542.25,-112.02)
  rect 2x48 on Bottom Overlay: 1(-1748.25,-156.02) 1(-1730.25,-236.02) 1(-1730.25,-74.02)
  rect 2x10 on Bottom Overlay: 1(-1746.25,-239.02) 1(-1746.25,-71.02) 1(-1544.25,-199.02) 1(-1544.25,-111.02) 1(-1532.25,-239.02) 1(-1532.25,-71.02)
  rect 2x50 on Bottom Overlay: 1(-1746.25,-155.02) 1(-1744.25,-155.02) 1(-1742.25,-155.02) 1(-1740.25,-155.02)
  rect 2x14 on Bottom Overlay: 1(-1744.25,-239.02) 1(-1744.25,-71.02) 1(-1546.25,-201.02) 1(-1546.25,-109.02) 1(-1534.25,-239.02)
  rect 2x20 on Bottom Overlay: 1(-1742.25,-72.02) 1(-1536.25,-72.02) 1(-1536.25,-238.02)
  rect 2x18 on Bottom Overlay: 1(-1742.25,-239.02)
  rect 2x24 on Bottom Overlay: 1(-1740.25,-238.02) 1(-1740.25,-72.02) 1(-1538.25,-238.02)
  rect 2x28 on Bottom Overlay: 1(-1738.25,-238.02)
  rect 2x58 on Bottom Overlay: 1(-1738.25,-155.02)
  rect 2x30 on Bottom Overlay: 1(-1738.25,-73.02) 1(-1540.25,-237.02) 1(-1540.25,-73.02)
  rect 2x68 on Bottom Overlay: 1(-1736.25,-156.02) 1(-1586.25,-212.02) 1(-1586.25,-98.02) 1(-1584.25,-98.02) 1(-1584.25,-212.02) 1(-1582.25,-98.02) 1(-1580.25,-214.02) 1(-1580.25,-96.02) 1(-1576.25,-216.02) 1(-1576.25,-94.02) 1(-1548.25,-84.02)
  rect 2x78 on Bottom Overlay: 1(-1734.25,-155.02) 1(-1674.25,-97.02) 1(-1674.25,-213.02) 1(-1604.25,-215.02) 1(-1604.25,-95.02)
  rect 2x86 on Bottom Overlay: 1(-1732.25,-155.02)
  rect 2x98 on Bottom Overlay: 1(-1730.25,-155.02) 1(-1640.25,-245.02) 1(-1638.25,-245.02) 1(-1636.25,-245.02)
  rect 2x214 on Bottom Overlay: 1(-1728.25,-155.02) 1(-1718.25,-155.02)
  rect 2x218 on Bottom Overlay: 1(-1726.25,-155.02) 1(-1722.25,-155.02) 1(-1720.25,-155.02)
  rect 2x222 on Bottom Overlay: 1(-1724.25,-155.02)
  rect 2x210 on Bottom Overlay: 1(-1716.25,-155.02) 1(-1714.25,-155.02)
  rect 2x206 on Bottom Overlay: 1(-1712.25,-155.02)
  rect 2x202 on Bottom Overlay: 1(-1710.25,-155.02)
  rect 2x200 on Bottom Overlay: 1(-1708.25,-156.02)
  rect 2x198 on Bottom Overlay: 1(-1706.25,-155.02)
  rect 2x194 on Bottom Overlay: 1(-1704.25,-155.02)
  rect 2x192 on Bottom Overlay: 1(-1702.25,-156.02)
  rect 2x190 on Bottom Overlay: 1(-1700.25,-155.02) 1(-1682.25,-155.02) 1(-1680.25,-155.02)
  rect 2x186 on Bottom Overlay: 1(-1698.25,-155.02) 1(-1686.25,-155.02) 1(-1684.25,-155.02)
  rect 2x184 on Bottom Overlay: 1(-1696.25,-156.02)
  rect 2x182 on Bottom Overlay: 1(-1694.25,-155.02) 1(-1692.25,-155.02) 1(-1690.25,-155.02) 1(-1688.25,-155.02)
  rect 2x92 on Bottom Overlay: 1(-1678.25,-206.02) 1(-1618.25,-236.02) 1(-1618.25,-74.02)
  rect 2x90 on Bottom Overlay: 1(-1678.25,-105.02) 1(-1660.25,-235.02) 1(-1660.25,-77.02)
  rect 2x84 on Bottom Overlay: 1(-1676.25,-210.02) 1(-1676.25,-100.02) 1(-1616.25,-80.02) 1(-1616.25,-230.02)
  rect 2x76 on Bottom Overlay: 1(-1672.25,-216.02) 1(-1672.25,-94.02) 1(-1608.25,-92.02) 1(-1606.25,-216.02) 1(-1606.25,-94.02) 1(-1596.25,-212.02) 1(-1596.25,-98.02) 1(-1594.25,-212.02) 1(-1594.25,-98.02) 1(-1554.25,-228.02) 1(-1554.25,-82.02)
  rect 2x74 on Bottom Overlay: 1(-1670.25,-217.02) 1(-1670.25,-93.02) 1(-1668.25,-219.02) 1(-1614.25,-223.02) 1(-1614.25,-87.02) 1(-1608.25,-219.02) 1(-1592.25,-213.02) 1(-1592.25,-99.02) 1(-1564.25,-223.02) 1(-1560.25,-225.02) 1(-1560.25,-85.02) 1(-1558.25,-227.02) 1(-1558.25,-85.02) 1(-1556.25,-227.02) 1(-1556.25,-83.02)
  rect 2x72 on Bottom Overlay: 1(-1668.25,-92.02) 1(-1666.25,-90.02) 1(-1666.25,-220.02) 1(-1664.25,-222.02) 1(-1664.25,-88.02) 1(-1612.25,-222.02) 1(-1612.25,-90.02) 1(-1610.25,-220.02) 1(-1610.25,-90.02) 1(-1590.25,-212.02) 1(-1590.25,-98.02) 1(-1588.25,-212.02) 1(-1588.25,-98.02) 1(-1568.25,-90.02) 1(-1566.25,-222.02) 1(-1566.25,-88.02) 1(-1564.25,-88.02) 1(-1562.25,-224.02) 1(-1562.25,-86.02) 1(-1552.25,-228.02) 1(-1552.25,-82.02)
  rect 2x80 on Bottom Overlay: 1(-1662.25,-228.02) 1(-1662.25,-82.02) 1(-1602.25,-214.02) 1(-1602.25,-98.02) 1(-1600.25,-212.02) 1(-1600.25,-98.02) 1(-1598.25,-212.02) 1(-1598.25,-98.02)
  rect 2x100 on Bottom Overlay: 1(-1658.25,-240.02) 1(-1658.25,-70.02) 1(-1650.25,-244.02) 1(-1650.25,-66.02) 1(-1648.25,-244.02) 1(-1648.25,-66.02) 1(-1646.25,-66.02) 1(-1646.25,-244.02) 1(-1644.25,-244.02) 1(-1644.25,-66.02) 1(-1642.25,-244.02) 1(-1642.25,-66.02) 1(-1640.25,-66.02) 1(-1638.25,-66.02) 1(-1636.25,-66.02) 1(-1634.25,-244.02) 1(-1634.25,-66.02) 1(-1632.25,-244.02) 1(-1632.25,-66.02) 1(-1630.25,-244.02) 1(-1630.25,-66.02) 1(-1628.25,-244.02) 1(-1628.25,-66.02) 1(-1626.25,-244.02)
  rect 2x102 on Bottom Overlay: 1(-1656.25,-243.02) 1(-1654.25,-243.02) 1(-1654.25,-67.02) 1(-1652.25,-243.02) 1(-1652.25,-67.02) 1(-1626.25,-67.02) 1(-1624.25,-243.02) 1(-1624.25,-67.02) 1(-1622.25,-243.02) 1(-1622.25,-67.02) 1(-1620.25,-241.02) 1(-1620.25,-69.02)
  rect 2x104 on Bottom Overlay: 1(-1656.25,-68.02)
  rect 2x66 on Bottom Overlay: 1(-1582.25,-213.02) 1(-1548.25,-227.02)
  rect 2x70 on Bottom Overlay: 1(-1578.25,-215.02) 1(-1578.25,-95.02) 1(-1574.25,-217.02) 1(-1574.25,-93.02) 1(-1572.25,-219.02) 1(-1572.25,-91.02) 1(-1570.25,-219.02) 1(-1570.25,-91.02) 1(-1568.25,-221.02) 1(-1550.25,-227.02) 1(-1550.25,-83.02)
  rect 2x26 on Bottom Overlay: 1(-1538.25,-73.02)
  rect 2x16 on Bottom Overlay: 1(-1534.25,-72.02)
  rect 2x6 on Bottom Overlay: 1(-1530.25,-239.02) 1(-1530.25,-71.02)
  rect 8x2 on Top Overlay: 1(-440.83,51.21) 1(-402.83,115.21) 1(-400.83,209.21) 1(-396.83,215.21) 1(-384.83,183.21) 1(-378.83,11.21) 1(-352.83,171.21) 1(-346.83,113.21) 1(-346.83,203.21) 1(-342.83,209.21) 1(-340.83,211.21) 1(-338.83,215.21) 1(-336.83,217.21) 1(-334.83,223.21) 1(-332.83,185.21) 1(-332.83,225.21) 1(-330.83,187.21) 1(-328.83,189.21) 1(-326.83,191.21) 1(-316.83,205.21) 1(-316.83,207.21) 1(-314.83,209.21) 1(-312.83,213.21) 1(-310.83,55.21) 1(-310.83,215.21) 1(-310.83,217.21) 1(-264.83,201.21) 1(-256.83,219.21) 1(-234.83,231.21) 1(-228.83,159.21) 1(-228.83,225.21) 1(-226.83,203.21) 1(-224.83,205.21) 1(-224.83,237.21) 1(-222.83,207.21) 1(-220.83,209.21) 1(-220.83,233.21) 1(-218.83,231.21) 1(-202.83,113.21) 1(-200.83,115.21) 1(-200.83,177.21) 1(-198.83,119.21) 1(-196.83,215.21) 1(-194.83,181.21) 1(-192.83,209.21) 1(-186.83,145.21) 1(-186.83,187.21) 1(-184.83,189.21) 1(-182.83,191.21) 1(-180.83,193.21) 1(-178.83,195.21) 1(-176.83,183.21) 1(-176.83,197.21) 1(-174.83,199.21) 1(-172.83,201.21) 1(-170.83,203.21) 1(-164.83,173.21) 1(-160.83,37.21) 1(-158.83,115.21) 1(-142.83,37.21)
  rect 10x2 on Top Overlay: 1(-439.83,53.21) 1(-437.83,55.21) 1(-435.83,57.21) 1(-435.83,179.21) 1(-433.83,59.21) 1(-433.83,181.21) 1(-431.83,61.21) 1(-429.83,63.21) 1(-429.83,183.21) 1(-427.83,65.21) 1(-425.83,185.21) 1(-423.83,71.21) 1(-423.83,187.21) 1(-421.83,73.21) 1(-419.83,189.21) 1(-417.83,191.21) 1(-415.83,193.21) 1(-413.83,195.21) 1(-411.83,197.21) 1(-405.83,203.21) 1(-403.83,205.21) 1(-401.83,113.21) 1(-401.83,207.21) 1(-399.83,211.21) 1(-397.83,197.21) 1(-397.83,213.21) 1(-395.83,217.21) 1(-391.83,193.21) 1(-389.83,191.21) 1(-387.83,189.21) 1(-385.83,185.21) 1(-385.83,187.21) 1(-377.83,13.21) 1(-371.83,157.21) 1(-349.83,173.21) 1(-345.83,175.21) 1(-343.83,111.21) 1(-343.83,177.21) 1(-341.83,109.21) 1(-339.83,107.21) 1(-339.83,179.21) 1(-337.83,181.21) 1(-335.83,183.21) 1(-333.83,231.21) 1(-331.83,227.21) 1(-331.83,229.21) 1(-313.83,211.21) 1(-309.83,57.21) 1(-309.83,219.21) 1(-279.83,93.21) 1(-277.83,95.21) 1(-275.83,11.21) 1(-275.83,211.21) 1(-267.83,205.21) 1(-265.83,203.21) 1(-265.83,227.21) 1(-263.83,175.21) 1(-259.83,223.21) 1(-257.83,221.21) 1(-249.83,65.21) 1(-241.83,191.21) 1(-239.83,193.21) 1(-235.83,195.21) 1(-233.83,197.21) 1(-231.83,199.21) 1(-231.83,229.21) 1(-229.83,201.21) 1(-229.83,227.21) 1(-209.83,73.21) 1(-207.83,83.21) 1(-207.83,85.21) 1(-207.83,87.21) 1(-207.83,89.21) 1(-207.83,91.21) 1(-207.83,93.21) 1(-207.83,95.21) 1(-199.83,117.21) 1(-197.83,121.21) 1(-197.83,179.21) 1(-195.83,123.21) 1(-191.83,183.21) 1(-189.83,185.21) 1(-175.83,61.21) 1(-173.83,181.21) 1(-165.83,233.21) 1(-161.83,229.21) 1(-159.83,39.21) 1(-141.83,31.21) 1(-141.83,33.21) 1(-141.83,35.21)
  rect 4x2 on Top Overlay: 1(-438.83,177.21) 1(-430.83,223.21) 1(-404.83,117.21) 1(-394.83,225.21) 1(-356.83,193.21) 1(-280.83,91.21) 1(-270.83,183.21) 1(-270.83,185.21) 1(-252.83,63.21) 1(-236.83,233.21) 1(-226.83,221.21) 1(-214.83,217.21) 1(-198.83,217.21) 1(-164.83,171.21) 1(-160.83,35.21)
  rect 12x2 on Top Overlay: 1(-426.83,67.21) 1(-424.83,69.21) 1(-420.83,75.21) 1(-418.83,77.21) 1(-416.83,79.21) 1(-416.83,81.21) 1(-414.83,83.21) 1(-412.83,87.21) 1(-410.83,89.21) 1(-408.83,93.21) 1(-394.83,195.21) 1(-392.83,219.21) 1(-370.83,31.21) 1(-370.83,33.21) 1(-370.83,35.21) 1(-370.83,37.21) 1(-370.83,39.21) 1(-370.83,41.21) 1(-370.83,43.21) 1(-370.83,45.21) 1(-370.83,47.21) 1(-370.83,49.21) 1(-370.83,51.21) 1(-370.83,53.21) 1(-370.83,55.21) 1(-370.83,57.21) 1(-370.83,59.21) 1(-370.83,61.21) 1(-370.83,63.21) 1(-370.83,65.21) 1(-370.83,67.21) 1(-370.83,69.21) 1(-370.83,71.21) 1(-370.83,73.21) 1(-370.83,75.21) 1(-370.83,77.21) 1(-370.83,79.21) 1(-370.83,81.21) 1(-370.83,83.21) 1(-370.83,85.21) 1(-370.83,87.21) 1(-370.83,89.21) 1(-370.83,91.21) 1(-370.83,93.21) 1(-370.83,95.21) 1(-370.83,97.21) 1(-370.83,99.21) 1(-370.83,101.21) 1(-370.83,103.21) 1(-370.83,105.21) 1(-370.83,107.21) 1(-370.83,109.21) 1(-370.83,111.21) 1(-370.83,113.21) 1(-370.83,115.21) 1(-370.83,117.21) 1(-370.83,119.21) 1(-370.83,121.21) 1(-370.83,123.21) 1(-370.83,125.21) 1(-370.83,127.21) 1(-370.83,129.21) 1(-370.83,131.21) 1(-370.83,133.21) 1(-370.83,135.21) 1(-370.83,137.21) 1(-370.83,139.21) 1(-370.83,141.21) 1(-370.83,143.21) 1(-370.83,145.21) 1(-370.83,147.21) 1(-338.83,105.21) 1(-336.83,103.21) 1(-334.83,101.21) 1(-320.83,197.21) 1(-320.83,199.21) 1(-310.83,59.21) 1(-274.83,97.21) 1(-272.83,99.21) 1(-268.83,207.21) 1(-264.83,105.21) 1(-252.83,117.21) 1(-252.83,183.21) 1(-250.83,185.21) 1(-248.83,67.21) 1(-248.83,69.21) 1(-248.83,71.21) 1(-248.83,73.21) 1(-248.83,79.21) 1(-248.83,81.21) 1(-248.83,83.21) 1(-248.83,85.21) 1(-248.83,87.21) 1(-248.83,89.21) 1(-248.83,91.21) 1(-248.83,93.21) 1(-248.83,95.21) 1(-248.83,97.21) 1(-248.83,99.21) 1(-248.83,101.21) 1(-248.83,103.21) 1(-248.83,105.21) 1(-246.83,187.21) 1(-244.83,189.21) 1(-222.83,235.21) 1(-218.83,47.21) 1(-216.83,51.21) 1(-214.83,55.21) 1(-214.83,57.21) 1(-212.83,59.21) 1(-212.83,61.21) 1(-212.83,63.21) 1(-210.83,65.21) 1(-210.83,67.21) 1(-210.83,69.21) 1(-210.83,71.21) 1(-208.83,79.21) 1(-208.83,81.21) 1(-206.83,97.21) 1(-206.83,99.21) 1(-206.83,101.21) 1(-206.83,103.21) 1(-206.83,105.21) 1(-194.83,31.21) 1(-194.83,33.21) 1(-194.83,35.21) 1(-194.83,37.21) 1(-194.83,39.21) 1(-194.83,41.21) 1(-194.83,43.21) 1(-194.83,45.21) 1(-194.83,47.21) 1(-194.83,49.21) 1(-194.83,51.21) 1(-194.83,53.21) 1(-194.83,55.21) 1(-194.83,57.21) 1(-194.83,59.21) 1(-194.83,61.21) 1(-194.83,63.21) 1(-194.83,65.21) 1(-194.83,67.21) 1(-194.83,69.21) 1(-194.83,71.21) 1(-194.83,73.21) 1(-194.83,125.21) 1(-192.83,127.21) 1(-186.83,143.21) 1(-164.83,175.21) 1(-164.83,209.21) 1(-164.83,211.21) 1(-160.83,41.21) 1(-160.83,43.21) 1(-158.83,69.21) 1(-158.83,71.21) 1(-158.83,73.21) 1(-158.83,79.21) 1(-158.83,81.21) 1(-158.83,83.21) 1(-158.83,85.21) 1(-158.83,87.21) 1(-158.83,89.21) 1(-158.83,91.21) 1(-158.83,93.21) 1(-158.83,95.21) 1(-158.83,97.21) 1(-158.83,99.21) 1(-158.83,101.21) 1(-158.83,103.21) 1(-158.83,105.21) 1(-158.83,113.21) 1(-140.83,217.21)
  rect 6x2 on Top Overlay: 1(-423.83,215.21) 1(-383.83,181.21) 1(-373.83,159.21) 1(-355.83,195.21) 1(-353.83,197.21) 1(-351.83,199.21) 1(-349.83,201.21) 1(-347.83,115.21) 1(-345.83,205.21) 1(-339.83,213.21) 1(-335.83,233.21) 1(-309.83,53.21) 1(-309.83,225.21) 1(-263.83,173.21) 1(-255.83,217.21) 1(-229.83,161.21) 1(-227.83,223.21) 1(-219.83,211.21) 1(-217.83,213.21) 1(-217.83,229.21) 1(-215.83,215.21) 1(-177.83,63.21) 1(-161.83,67.21) 1(-161.83,181.21) 1(-161.83,183.21) 1(-161.83,185.21) 1(-161.83,187.21) 1(-161.83,189.21) 1(-161.83,191.21) 1(-161.83,193.21) 1(-161.83,195.21) 1(-161.83,197.21) 1(-161.83,199.21) 1(-161.83,201.21) 1(-161.83,203.21) 1(-161.83,217.21) 1(-161.83,219.21) 1(-161.83,221.21) 1(-161.83,223.21) 1(-161.83,225.21) 1(-161.83,227.21) 1(-159.83,117.21) 1(-141.83,39.21) 1(-141.83,41.21) 1(-141.83,43.21) 1(-141.83,45.21) 1(-141.83,47.21) 1(-141.83,49.21) 1(-141.83,51.21) 1(-141.83,53.21) 1(-141.83,55.21)
  rect 16x2 on Top Overlay: 1(-422.83,217.21) 1(-406.83,97.21) 1(-404.83,101.21) 1(-402.83,103.21) 1(-396.83,223.21) 1(-394.83,29.21) 1(-376.83,17.21) 1(-368.83,151.21) 1(-332.83,219.21) 1(-328.83,95.21) 1(-326.83,93.21) 1(-324.83,91.21) 1(-322.83,89.21) 1(-322.83,193.21) 1(-322.83,201.21) 1(-320.83,85.21) 1(-320.83,195.21) 1(-310.83,63.21) 1(-310.83,65.21) 1(-310.83,67.21) 1(-262.83,177.21) 1(-238.83,27.21) 1(-234.83,29.21) 1(-234.83,143.21) 1(-232.83,31.21) 1(-232.83,145.21) 1(-230.83,33.21) 1(-230.83,147.21) 1(-226.83,155.21) 1(-192.83,27.21) 1(-190.83,25.21) 1(-186.83,141.21) 1(-168.83,55.21) 1(-166.83,53.21) 1(-166.83,179.21) 1(-166.83,205.21) 1(-164.83,51.21) 1(-162.83,47.21) 1(-162.83,49.21) 1(-140.83,27.21)
  rect 30x2 on Top Overlay: 1(-415.83,219.21) 1(-379.83,23.21)
  rect 14x2 on Top Overlay: 1(-413.83,85.21) 1(-409.83,91.21) 1(-407.83,95.21) 1(-405.83,99.21) 1(-405.83,201.21) 1(-401.83,111.21) 1(-377.83,15.21) 1(-371.83,29.21) 1(-369.83,149.21) 1(-369.83,155.21) 1(-331.83,99.21) 1(-331.83,205.21) 1(-329.83,97.21) 1(-309.83,61.21) 1(-273.83,209.21) 1(-269.83,101.21) 1(-267.83,103.21) 1(-263.83,225.21) 1(-253.83,115.21) 1(-251.83,119.21) 1(-249.83,121.21) 1(-247.83,123.21) 1(-245.83,125.21) 1(-245.83,127.21) 1(-243.83,129.21) 1(-241.83,131.21) 1(-241.83,133.21) 1(-239.83,135.21) 1(-235.83,141.21) 1(-227.83,35.21) 1(-227.83,157.21) 1(-225.83,37.21) 1(-223.83,39.21) 1(-223.83,41.21) 1(-221.83,43.21) 1(-219.83,45.21) 1(-217.83,49.21) 1(-215.83,53.21) 1(-193.83,29.21) 1(-191.83,129.21) 1(-189.83,131.21) 1(-173.83,59.21) 1(-171.83,57.21) 1(-165.83,177.21) 1(-165.83,207.21) 1(-163.83,231.21) 1(-161.83,45.21) 1(-141.83,29.21)
  rect 44x2 on Top Overlay: 1(-410.83,221.21)
  rect 20x2 on Top Overlay: 1(-404.83,199.21) 1(-400.83,105.21) 1(-400.83,107.21) 1(-338.83,207.21) 1(-324.83,203.21) 1(-266.83,15.21) 1(-262.83,179.21) 1(-260.83,17.21) 1(-254.83,19.21) 1(-226.83,153.21) 1(-184.83,135.21) 1(-140.83,25.21)
  rect 18x2 on Top Overlay: 1(-399.83,109.21) 1(-367.83,153.21) 1(-321.83,87.21) 1(-319.83,83.21) 1(-317.83,81.21) 1(-315.83,77.21) 1(-315.83,79.21) 1(-313.83,73.21) 1(-313.83,75.21) 1(-311.83,69.21) 1(-311.83,71.21) 1(-271.83,13.21) 1(-253.83,113.21) 1(-249.83,21.21) 1(-245.83,23.21) 1(-241.83,25.21) 1(-229.83,149.21) 1(-227.83,151.21) 1(-187.83,133.21)
  rect 38x2 on Top Overlay: 1(-383.83,27.21)
  rect 36x2 on Top Overlay: 1(-382.83,25.21) 1(-320.83,221.21)
  rect 24x2 on Top Overlay: 1(-378.83,21.21) 1(-314.83,223.21) 1(-260.83,181.21) 1(-186.83,211.21)
  rect 22x2 on Top Overlay: 1(-377.83,19.21)
  rect 2x2 on Top Overlay: 1(-353.83,169.21) 1(-347.83,117.21) 1(-217.83,227.21) 1(-201.83,175.21) 1(-187.83,147.21) 1(-177.83,185.21)
  rect 68x2 on Top Overlay: 1(-210.83,139.21) 1(-164.83,23.21)
  rect 118x2 on Top Overlay: 1(-209.83,107.21) 1(-207.83,109.21)
  rect 70x2 on Top Overlay: 1(-209.83,137.21) 1(-165.83,213.21)
  rect 116x2 on Top Overlay: 1(-206.83,111.21)
  rect 102x2 on Top Overlay: 1(-203.83,75.21) 1(-203.83,77.21)
  rect 54x2 on Top Overlay: 1(-165.83,15.21)
  rect 58x2 on Top Overlay: 1(-165.83,17.21)
  rect 66x2 on Top Overlay: 1(-165.83,21.21)
  rect 64x2 on Top Overlay: 1(-164.83,19.21)
  rect 50x2 on Top Overlay: 1(-157.83,215.21)

## Via types
v1: diameter 19.68, hole 9.84, Top Layer to Bottom Layer, tented top, 176 vias
v2: diameter 25.98, hole 12.99, Top Layer to Bottom Layer, tented top, 36 vias
v3: diameter 20, hole 10, Top Layer to Bottom Layer, tented bottom, 2 vias

## Nets (pads, with @x,y where several pads share a name; then routed paths per layer and width w, separated by ;. In a path a pad name is that pad's centre, name@x,y a point inside that pad or via, vN(x,y) a via of type N, cw(c..) or ccw(c..) an arc to the next point about the centre after c; other vN are vias at no path point)
AUX_I2C_SCL: JP10C.48 U10C.14 | length 742.3
  Top Layer w5: U10C.14@-561.25,-325 -527.99,-358.27 v1(-474.41,-358.27)
  Bottom Layer w5: v1(-474.41,-358.27) -474.41,-246.06 -456.69,-228.35 -410.43,-228.35 -303.15,-121.06 -303.15,0 -351.38,48.23 -383.86,48.23 -429.13,93.5 JP10C.48@-429.13,114.17
AUX_I2C_SDA: JP10C.47 U10C.15 | length 550.4
  Top Layer w5: U10C.15@-547.33,-311.09 v1(-519.83,-338.58)
  Bottom Layer w5: v1(-519.83,-338.58) -486.22,-304.97 -486.22,-242.13 -445.87,-201.77 -445.87,-116.14 -431.1,-101.38 -431.1,-30.51 -445.87,-15.75 -445.87,26.57 -428.15,44.29 -428.15,75.79 -448.82,96.46 JP10C.47@-448.82,114.17
BATT_VDD: C23C.1 C34C.1 C35C.1 JP10C.1 JP10C.2 JP10C.3 JP10C.4 JP10C.5 P10C.26 P10C.27 P10C.28 P10C.29 | length 2095
  Top Layer w10: P10C.29@-1531.5,-848.43 -1497.05,-848.43 -1483.27,-834.65 v1@-1483.27,-828.74 ; P10C.28@-1531.5,-828.74 v1@-1483.27,-828.74 ; P10C.27@-1531.5,-809.06 -1483.27,-809.06 ; P10C.26@-1531.5,-789.37 -1496.06,-789.37 -1483.27,-802.17 -1483.27,-809.06 v1@-1483.27,-828.74 ; v1(-1294.29,71.85) C35C.1@-1294.29,113.19
  Top Layer w20: C23C.1@-1375.98,-852.36 -1319.88,-852.36 C34C.1@-1288.39,-820.87
  Top Layer w40: -1475.39,-814.96 -1475.39,-817.91 -1440.94,-852.36 C23C.1@-1375.98,-852.36
  Bottom Layer w10: JP10C.1@-1354.33,114.17 -1354.33,86.61 -1340.55,72.83 -1332.68,72.83 ; JP10C.2@-1334.65,114.17 -1334.65,74.8 -1332.68,72.83 ; JP10C.3@-1314.96,114.17 -1314.96,73.33 -1314.47,72.83 ; JP10C.4@-1295.28,114.17 -1295.28,79.72 v1@-1288.39,72.83 ; JP10C.5@-1275.59,114.17 -1275.59,85.63 v1@-1288.39,72.83 ; -1332.68,72.83 -1314.47,72.83 ; -1314.47,72.83 v1@-1288.39,72.83
  Bottom Layer w50: v1(-1448.82,-833.66) -1453.74,-833.66 -1473.43,-813.98 -1586.61,-813.98 -1651.57,-749.02 -1651.57,-227.36 -1564.96,-140.75 -1342.52,-140.75 -1289.37,-87.6 -1289.37,59.06
  other v1: -1479.33,-830.71 -1472.44,-804.13
C_EDP_TX0_N: C12C.1 P10C.6 | length 101.6
  Top Layer w4.02: P10C.6@-1531.5,-395.67 -1515.59,-395.67 -1511.81,-399.45 -1491.97,-399.45 -1491.14,-398.62 -1442.91,-398.62 C12C.1@-1435.04,-390.75
C_EDP_TX0_P: C13C.1 P10C.7 | length 104.2
  Top Layer w4.02: P10C.7@-1531.5,-415.35 -1517.72,-415.35 -1510.83,-408.46 -1488.23,-408.46 -1487.41,-407.64 -1442.76,-407.64 C13C.1@-1434.06,-416.34
C_EDP_TX1_N: C10C.1 P10C.3 | length 113
  Top Layer w4.02: P10C.3@-1531.5,-336.61 -1515.59,-336.61 -1511.81,-340.39 -1500.78,-340.39 -1472.24,-311.85 -1442.76,-311.85 C10C.1@-1435.04,-304.13
C_EDP_TX1_P: C11C.1 P10C.4 | length 114.4
  Top Layer w4.02: P10C.4@-1531.5,-356.3 -1517.72,-356.3 -1510.83,-349.41 -1497.05,-349.41 -1468.5,-320.87 -1442.91,-320.87 C11C.1@-1435.04,-328.74
C_EDP_TXAUX_N: C15C.1 P10C.10 R30C.1 | length 204.4
  Top Layer w4.02: P10C.10@-1531.5,-474.41 -1517.72,-474.41 -1510.83,-467.52 -1491.14,-467.52 -1464.57,-494.09 -1442.91,-494.09 C15C.1@-1435.04,-501.97
  Bottom Layer w4.02: R30C.1@-1527.56,-476.38 -1523.62,-476.38 -1511.81,-464.57 -1493.11,-464.57 v1(-1456.69,-500.98)
C_EDP_TXAUX_P: C14C.1 P10C.9 R31C.1 | length 201
  Top Layer w4.02: P10C.9@-1531.5,-454.72 -1515.59,-454.72 -1511.81,-458.5 -1487.41,-458.5 v1@-1463.11,-482.8 ; v1@-1460.83,-485.08 -1442.76,-485.08 C14C.1@-1435.04,-477.36
  Bottom Layer w4.02: R31C.1@-1527.56,-429.13 -1501.14,-455.55 -1489.33,-455.55 -1466.56,-478.32 -1458.64,-478.32 v1(-1456.69,-476.38)
DBG0: J15C.1 U10C.8 | length 741.5
  Top Layer w4: U10C.8@-644.77,-408.52 -618.25,-435.04 -611.22,-435.04 -566.93,-479.33 -566.93,-537.4 -577.76,-548.23 -577.76,-607.28 v1(-566.93,-618.11)
  Bottom Layer w4: v1(-1007.87,-728.35) -964.57,-685.04 -818.9,-685.04 -788.39,-654.53 -603.35,-654.53 v1(-566.93,-618.11)
DBG1: J13C.1 U10C.9 | length 803.7
  Top Layer w4: U10C.9@-630.85,-394.6 -619.09,-406.36 -619.09,-415.35 -558.93,-475.52 -558.93,-495.2 v1(-544.29,-509.84)
  Bottom Layer w4: v1(-944.88,-728.35) -917.32,-755.91 -807.09,-755.91 -738.19,-687.01 -540.35,-687.01 -504.92,-651.57 -504.92,-591.54 -544.29,-552.17 v1(-544.29,-509.84)
DBG2: J12C.1 U10C.10 | length 692.6
  Top Layer w6: U10C.10@-616.93,-380.68 -597.44,-400.17 v1(-597.44,-413.39)
  Bottom Layer w6: v1(-881.89,-728.35) -807.09,-728.35 -748.03,-669.29 -562.99,-669.29 -516.73,-623.03 -516.73,-594.49 -572.83,-538.39 -572.83,-465.55 -597.44,-440.94 v1(-597.44,-413.39)
EDP_HPD: P10C.17 R24C.2 R25C.1 R29C.2 | length 283.3
  Top Layer w6: P10C.17@-1531.5,-612.2 -1478.35,-612.2 v1@-1435.04,-655.51 ; v1(-1434.06,-655.51) R24C.2@-1375.98,-655.51 -1377.95,-653.54 R25C.1@-1377.95,-606.3
  Bottom Layer w6: v1(-1434.06,-655.51) -1375.98,-655.51 R29C.2@-1374.02,-657.48
EDP_TX0_N: C12C.2 U10C.59 | length 649.6
  Top Layer w4.02: C12C.2@-1374.02,-381.89 -1371.06,-381.89 -1353.5,-399.45 -1237.36,-399.45 -1083.66,-553.15 -988.14,-553.15 -939.45,-504.45 -939.45,-494.56 -934.06,-489.17 -924.17,-489.17 -915.15,-480.16 -905.35,-480.16 -890.59,-465.39 -874.66,-465.39 -863.1,-453.83 -863.1,-444.51 U10C.59@-854.95,-436.36
EDP_TX0_P: C13C.2 U10C.60 | length 649.9
  Top Layer w4.02: C13C.2@-1374.02,-425.2 -1370.08,-425.2 -1353.35,-408.46 -1241.1,-408.46 -1087.4,-562.17 -984.41,-562.17 -911.42,-489.17 -901.62,-489.17 -886.86,-474.41 -870.93,-474.41 -854.76,-458.24 -848.99,-458.24 U10C.60@-841.03,-450.28
EDP_TX1_N: C10C.2 U10C.56 | length 628.4
  Top Layer w4.02: C10C.2@-1374.02,-295.28 -1368.11,-295.28 -1351.38,-312.01 -1247.05,-312.01 -1050.2,-508.86 -994.09,-508.86 -928.15,-442.91 -928.15,-435.36 -924.54,-431.76 -924.54,-422.57 -919.45,-417.49 -910.27,-417.49 -904.86,-412.07 -904.86,-402.75 U10C.56@-896.71,-394.6
EDP_TX1_P: C11C.2 U10C.57 | length 629.8
  Top Layer w4.02: C11C.2@-1374.02,-338.58 -1369.09,-338.58 -1351.54,-321.02 -1250.78,-321.02 -1053.93,-517.87 -990.36,-517.87 -919.13,-446.65 -919.13,-439.1 -896.51,-416.48 -890.75,-416.48 U10C.57@-882.79,-408.52
EDP_TXAUX_N: C15C.2 U10C.47 | length 724.6
  Top Layer w4.02: C15C.2@-1374.02,-511.81 -1370.08,-511.81 -1353.35,-495.08 v1@-1329.72,-495.08 ; v1@-1184.06,-243.11 -1062.99,-243.11 -1044.29,-224.41 -1005.24,-224.41 -997.7,-231.95 -988.37,-231.95 U10C.47@-980.23,-240.1
  Bottom Layer w4.02: v1@-1327.76,-495.24 -1361.02,-495.24 -1379.09,-477.16 -1379.09,-292.53 -1329.52,-242.95 v1@-1187.79,-242.95
  other v1: -1328.74,-502.95 -1184.06,-235.24
EDP_TXAUX_P: C14C.2 U10C.48 | length 722.5
  Top Layer w4.02: C14C.2@-1374.02,-468.5 -1371.06,-468.5 -1353.5,-486.06 v1@-1329.72,-486.06 ; v1@-1184.06,-252.13 -1146.65,-252.13 -1137.95,-260.83 -1125.83,-260.83 -1117.13,-252.13 -1098.43,-252.13 -1089.72,-260.83 -1078.58,-260.83 -1069.88,-252.13 -1059.26,-252.13 -1040.56,-233.43 -1008.97,-233.43 -1002.1,-240.29 -1002.1,-246.06 U10C.48@-994.15,-254.02
  Bottom Layer w4.02: v1@-1327.76,-486.22 -1357.28,-486.22 -1370.08,-473.43 -1370.08,-468.5 -1364.17,-462.6 -1364.17,-454.72 -1370.08,-448.82 -1370.08,-296.26 -1365.16,-291.34 -1354.33,-291.34 -1347.93,-284.94 -1347.93,-274.11 -1325.79,-251.97 -1309.06,-251.97 -1301.18,-259.84 -1289.37,-259.84 -1281.5,-251.97 v1@-1184.06,-251.97
  other v1: -1328.74,-478.35 -1184.06,-259.84